# Altium PCB CURRENT_MEASURE.PcbDoc
Units mil, origin at the board's own origin, x right, y up, seen from the top; angles counter-clockwise.
Board outline 900.03 x 840.03 mil, 2 copper layers (Top Layer, Bottom Layer); 9 components, 7 nets, 38 pads, 0 vias.
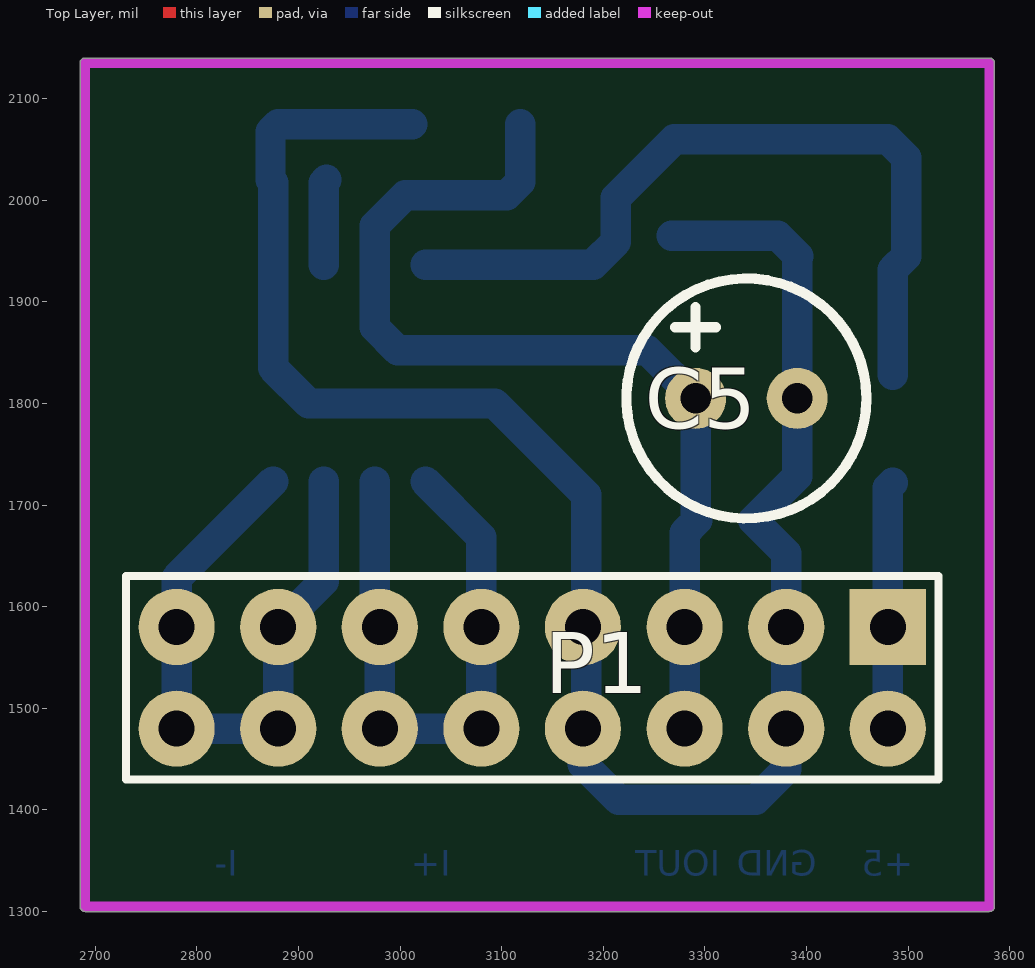
[diagram p0: Top Layer view]
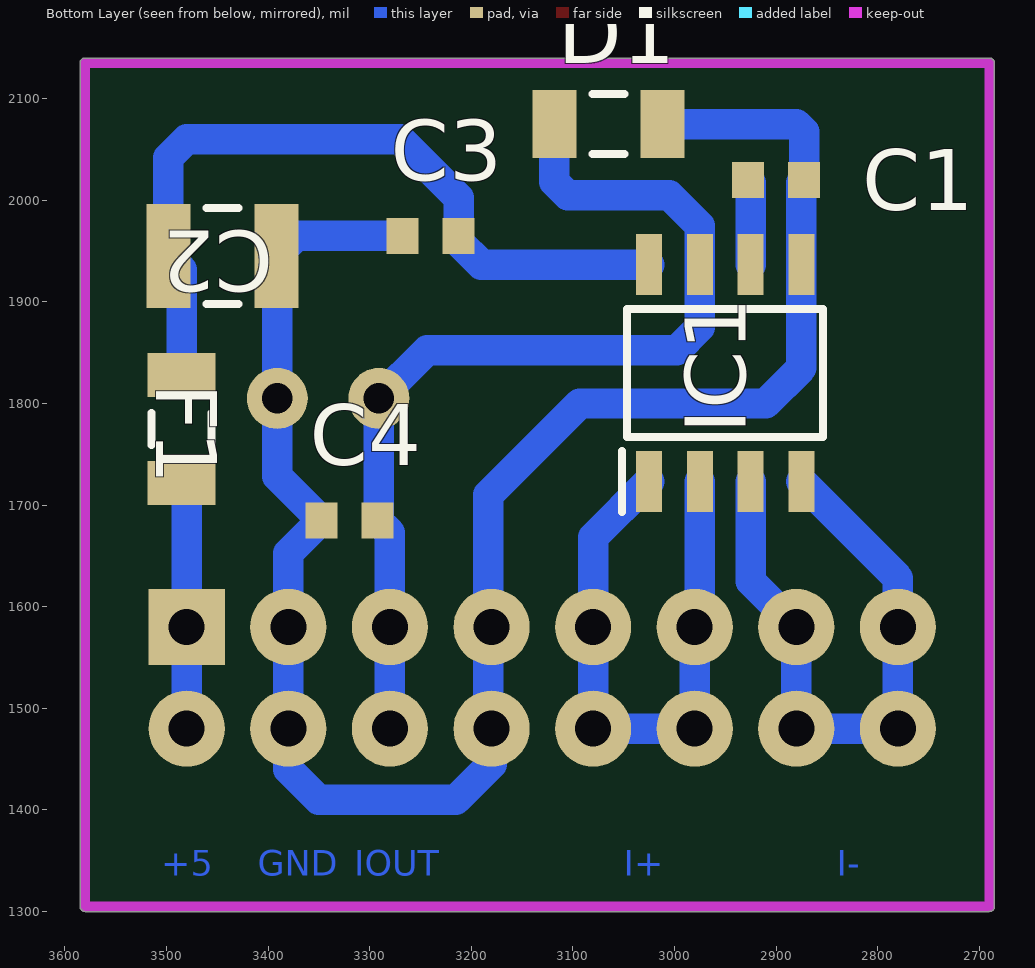
[diagram p1: Bottom Layer view, seen from below]

## Layer stack, top to bottom
Top Solder: solder mask 0.4, Solder Resist, Dk 3.5
Top Layer: signal copper 1.4
Dielectric 1: dielectric 12.6, FR-4, Dk 4.8
Bottom Layer: signal copper 1.4
Bottom Solder: solder mask 0.4, Solder Resist, Dk 3.5

## Board outline
2684.99,1305 ccw(c2690,1305) 2690,1299.98 3580,1299.98 ccw(c3580,1305) 3585.01,1305 3585.01,2135 ccw(c3580,2135) 3580,2140.01 2690,2140.01 ccw(c2690,2135) 2684.99,2135

## Design rules (kind name [scope] priority, off if disabled: settings)
Clearance [All] p1: gap=10 ignorepadtopadclearanceinfootprint=FALSE except(0: Arc-Hole Track-Hole SMDPad-Hole THPad-Hole Via-Hole Fill-Hole Poly-Hole Region-Hole Text-Hole)
PolygonConnect [All] p1: connectstyle=Relief reliefconductorwidth=30 reliefentries=4 polygonreliefangle="90 Angle" airgapwidth=20
RoomDefinition CURRENT_MEASURE [InComponentClass('CURRENT_MEASURE')] p1: confinementstyle=ConfineIn formatcopy=TRUE lockcomponents=FALSE outline 2690,1305 3585,1305 3585,2135 2690,2135
RoutingVias [All] p1: holewidth=28 width=50 viastyle="Through Hole" minholewidth=28 minwidth=50 maxholewidth=28 maxwidth=50
SolderMaskExpansion [All] p1: expansion=4
Width [All] p1: maxlimit=30 minlimit=10 preferedwidth=30 minimp=50.000000 maximp=50.000000 favimp=50.000000
30 further rules are at their usual default settings.

## Components (designator, comment, footprint, x,y, rotation, side; value= is the part's Value field where it differs from the comment)
C1 "Cap" 1608[0603] 2900,2020 r180 bottom value=0.1uF
C2 "Cap" C1210 3445,1945 r0 bottom value=10uF
C3 "Cap" 1608[0603] 3240,1965 r0 bottom value=0.1uF
C4 "Cap" 1608[0603] 3320,1685 r0 bottom value=0.1uF
C5 "10u'F" CAP-6 3290.87,1805 r0 top value=100pF
D1 "D Zener" C1206 3065,2075 r0 bottom
F1 "Fuse 2" C1206 3485,1775 r270 bottom
IC1 "ACS712ELCTR-05B-T" SOIC127P600X175-8N 2950,1830 r90 bottom
P1 "Header 8X2" HDR2X8 3480,1580 r180 top

## Footprints (in the part's own frame and the unit in brackets; to place one, negate y for a bottom-side part, rotate by r counter-clockwise, add the part's x,y. Pads: shape width x height; smd on the part's side, far side on the other; paste and mask are expansions set on the pad)
1608[0603] [mm] "Chip Capacitor, Body 1.6x0.8mm, IPC High Density"
  rect 0.8x0.9 smd: 1(-0.7,0) 2(0.7,0)
  body extent -0.87,-0.48 0.87,0.48, height 1.3
C1206 [mm] "Chip Capacitor, Body 3.2x1.6mm, IPC High Density"
  rect 1.1x1.7 smd: 1(-1.35,0) 2(1.35,0)
  silkscreen extent -0.4,-0.75 0.4,0.75, body extent -1.7,-0.9 1.7,0.9, height 1.3
C1210 [mm] "Chip Capacitor, Body 3.2x2.5mm, IPC High Density"
  rect 1.1x2.6 smd: 1(-1.35,0) 2(1.35,0)
  silkscreen extent -0.4,-1.2 0.4,1.2, body extent -1.7,-1.35 1.7,1.35, height 1.3
CAP-6 [mil]
  round 60 hole 30: 1(0,0) 2(100,0)
  silkscreen extent -68,-118 168,118
HDR2X8 [mm] "Connector; Header; 8x2 Position"
  rect 1.905x1.905 hole 0.9: 1(0,0)
  round 1.905 hole 0.9: 2(0,2.54) 3(2.54,0) 4(2.54,2.54) 5(5.08,0) 6(5.08,2.54) 7(7.62,0) 8(7.62,2.54) 9(10.16,0) 10(10.16,2.54) 11(12.7,0) 12(12.7,2.54) 13(15.24,0) 14(15.24,2.54) 15(17.78,0) 16(17.78,2.54)
  silkscreen extent -1.27,-1.27 19.05,3.81
SOIC127P600X175-8N [mm]
  rect 1.525x0.65 smd: 1(-2.712,1.905) 2(-2.712,0.635) 3(-2.712,-0.635) 4(-2.712,-1.905) 5(2.712,-1.905) 6(2.712,-0.635) 7(2.712,0.635) 8(2.712,1.905)
  silkscreen extent -3.47,-2.45 1.6,2.58, body extent -3,-2.45 3,2.45, height 1.75

## Part data
C1 C2 C3 C4: "Capacitor", LatestRevisionDate=17-Jul-2002, LatestRevisionNote="Re-released for DXP Platform.", PackageDescription="Radial Cap, Thru-Hole; 2 Leads; 0.3 in Pin Spacing", PackageReference=RAD-0.3, Published=8-Jun-2000, Publisher="Altium Limited"
C5: library part Cap2, "Capacitor", PackageDescription="Capacitor; 2 Leads", PackageReference=CAPR5-4X5, Published=23-Sep-2002, Publisher="Altium Limited"
D1: "Zener Diode", LatestRevisionDate=17-Jul-2002, LatestRevisionNote="Re-released for DXP Platform.", PackageDescription="Diode, Thru-Hole; 2 Leads; 0.7 in Pin Spacing", PackageReference=DIODE-0.7, Published=8-Jun-2000, Publisher="Altium Limited"
F1: "Fuse", LatestRevisionDate=17-Jul-2002, LatestRevisionNote="Re-released for DXP Platform.", PackageDescription="Thru-Hole; 2 Leads", PackageReference=PIN-W2/E2.8, Published=8-Jun-2000, Publisher="Altium Limited"
IC1: "Integrated Circuit", Manufacturer_Name="Allegro Microsystems", RS Part Number=1729270, Allied_Number=R1076681, Allied Price/Stock=http://www.alliedelec.com/allegro-microsystems-acs712elctr-05b-t/R1076681/, Datasheet Link=http://docs-emea.rs-online.com/webdocs/0d88/0900766b80d885f5.pdf, Height=1.75mm, Manufacturer_Part_Number=ACS712ELCTR-05B-T, RS Price/Stock=http://uk.rs-online.com/web/p/products/1729270
P1: "Header, 8-Pin, Dual row", LatestRevisionDate=17-Jul-2002, LatestRevisionNote="Re-released for DXP Platform.", Publisher="Altium Limited"

## Nets (pads, with @x,y where several pads share a name; then routed paths per layer and width w, separated by ;. In a path a pad name is that pad's centre, name@x,y a point inside that pad or via, vN(x,y) a via of type N, cw(c..) or ccw(c..) an arc to the next point about the centre after c; other vN are vias at no path point)
+5: F1.2 P1.1 P1.2 | length 243.9
  Bottom Layer w30: P1.2 P1.1 3480,1716.85 F1.2
+5_Fused: C2.2 C3.1 F1.1 IC1.8 | length 776.1
  Bottom Layer w30: IC1.8 3189.92,1936.77 3212.44,1959.29 C3.1 3212.44,2002.44 3270,2060 3480,2060 3498.15,2041.85 C2.2 3485,1931.85 F1.1
GND: C1.2 C2.1 C3.2 C4.2 C5.2 D1.1 IC1.5 P1.3 P1.4 P1.7 P1.8 | length 1898.7
  Bottom Layer w30: D1.1 2880,2075 2872.44,2067.44 C1.2 2875,2017.44 IC1.5 2875,1835 2910,1800 3093.23,1800 3183.23,1710 3183.23,1483.23 P1.8 3180,1445 3215,1410 3350,1410 3380,1440 P1.4 P1.3 3380,1652.56 C4.2 3390.87,1728.31 3390.87,1825 3390.87,1944.02 C2.1 3371.85,1965 C3.2
I+: IC1.1 IC1.2 P1.9 P1.10 P1.11 P1.12 | length 611.3
  Bottom Layer w30: IC1.2 2975,1585 P1.11 P1.12 P1.10 P1.9 3080,1668.23 IC1.1
I-: IC1.3 IC1.4 P1.13 P1.14 P1.15 P1.16 | length 644.4
  Bottom Layer w30: IC1.4 2780,1628.23 P1.15 P1.16 P1.14 P1.13 2925,1625 IC1.3
Iout: C4.1 C5.1 D1.2 IC1.7 P1.5 P1.6 | length 993.5
  Bottom Layer w30: D1.2 3118.15,2018.15 3105,2005 3005,2005 2975,1975 IC1.7 2975,1875 2997.5,1852.5 3243.37,1852.5 C5.1 3290.87,1686.57 C4.1 3280,1672.56 P1.5 P1.6
NetC1_1: C1.1 IC1.6 | length 84.3
  Bottom Layer w30: IC1.6 2925,2017.44 C1.1

## Polygon pours and split planes (outlines as drawn)
no net on Bottom Layer "Top Layer-No Net 2" (solid, pour order 2): 3075,1695
no net on Bottom Layer "Top Layer-No Net 1" (solid, pour order 8): 3065,1715
no net on Bottom Layer "Top Layer-No Net" (solid, pour order 10): 3065,1690

## Keep-outs
Keep-Out Layer:
  lines w10: 2690,1305 2690,2135 3580,2135 3580,1305 2690,1305

## Other copper
Bottom Layer:
  text "I-" at 2840,1335 h25
  text "I+" at 3050,1335 h25
  text "IOUT" at 3315,1335 h25
  text "GND" at 3410,1335 h25
  text "+5" at 3505,1335 h25